# Altium PCB JtagProgCable.PcbDoc (part 1 of 2)
Units mil, origin at the board's own origin, x right, y up, seen from the top; angles counter-clockwise.
Board outline 2330 x 3440 mil, 4 copper layers (Top Layer, MidLayer1, VCC, Bottom Layer); 204 components, 19 nets, 965 pads, 156 vias.
Unrouted connection lines stored in the file: 209.
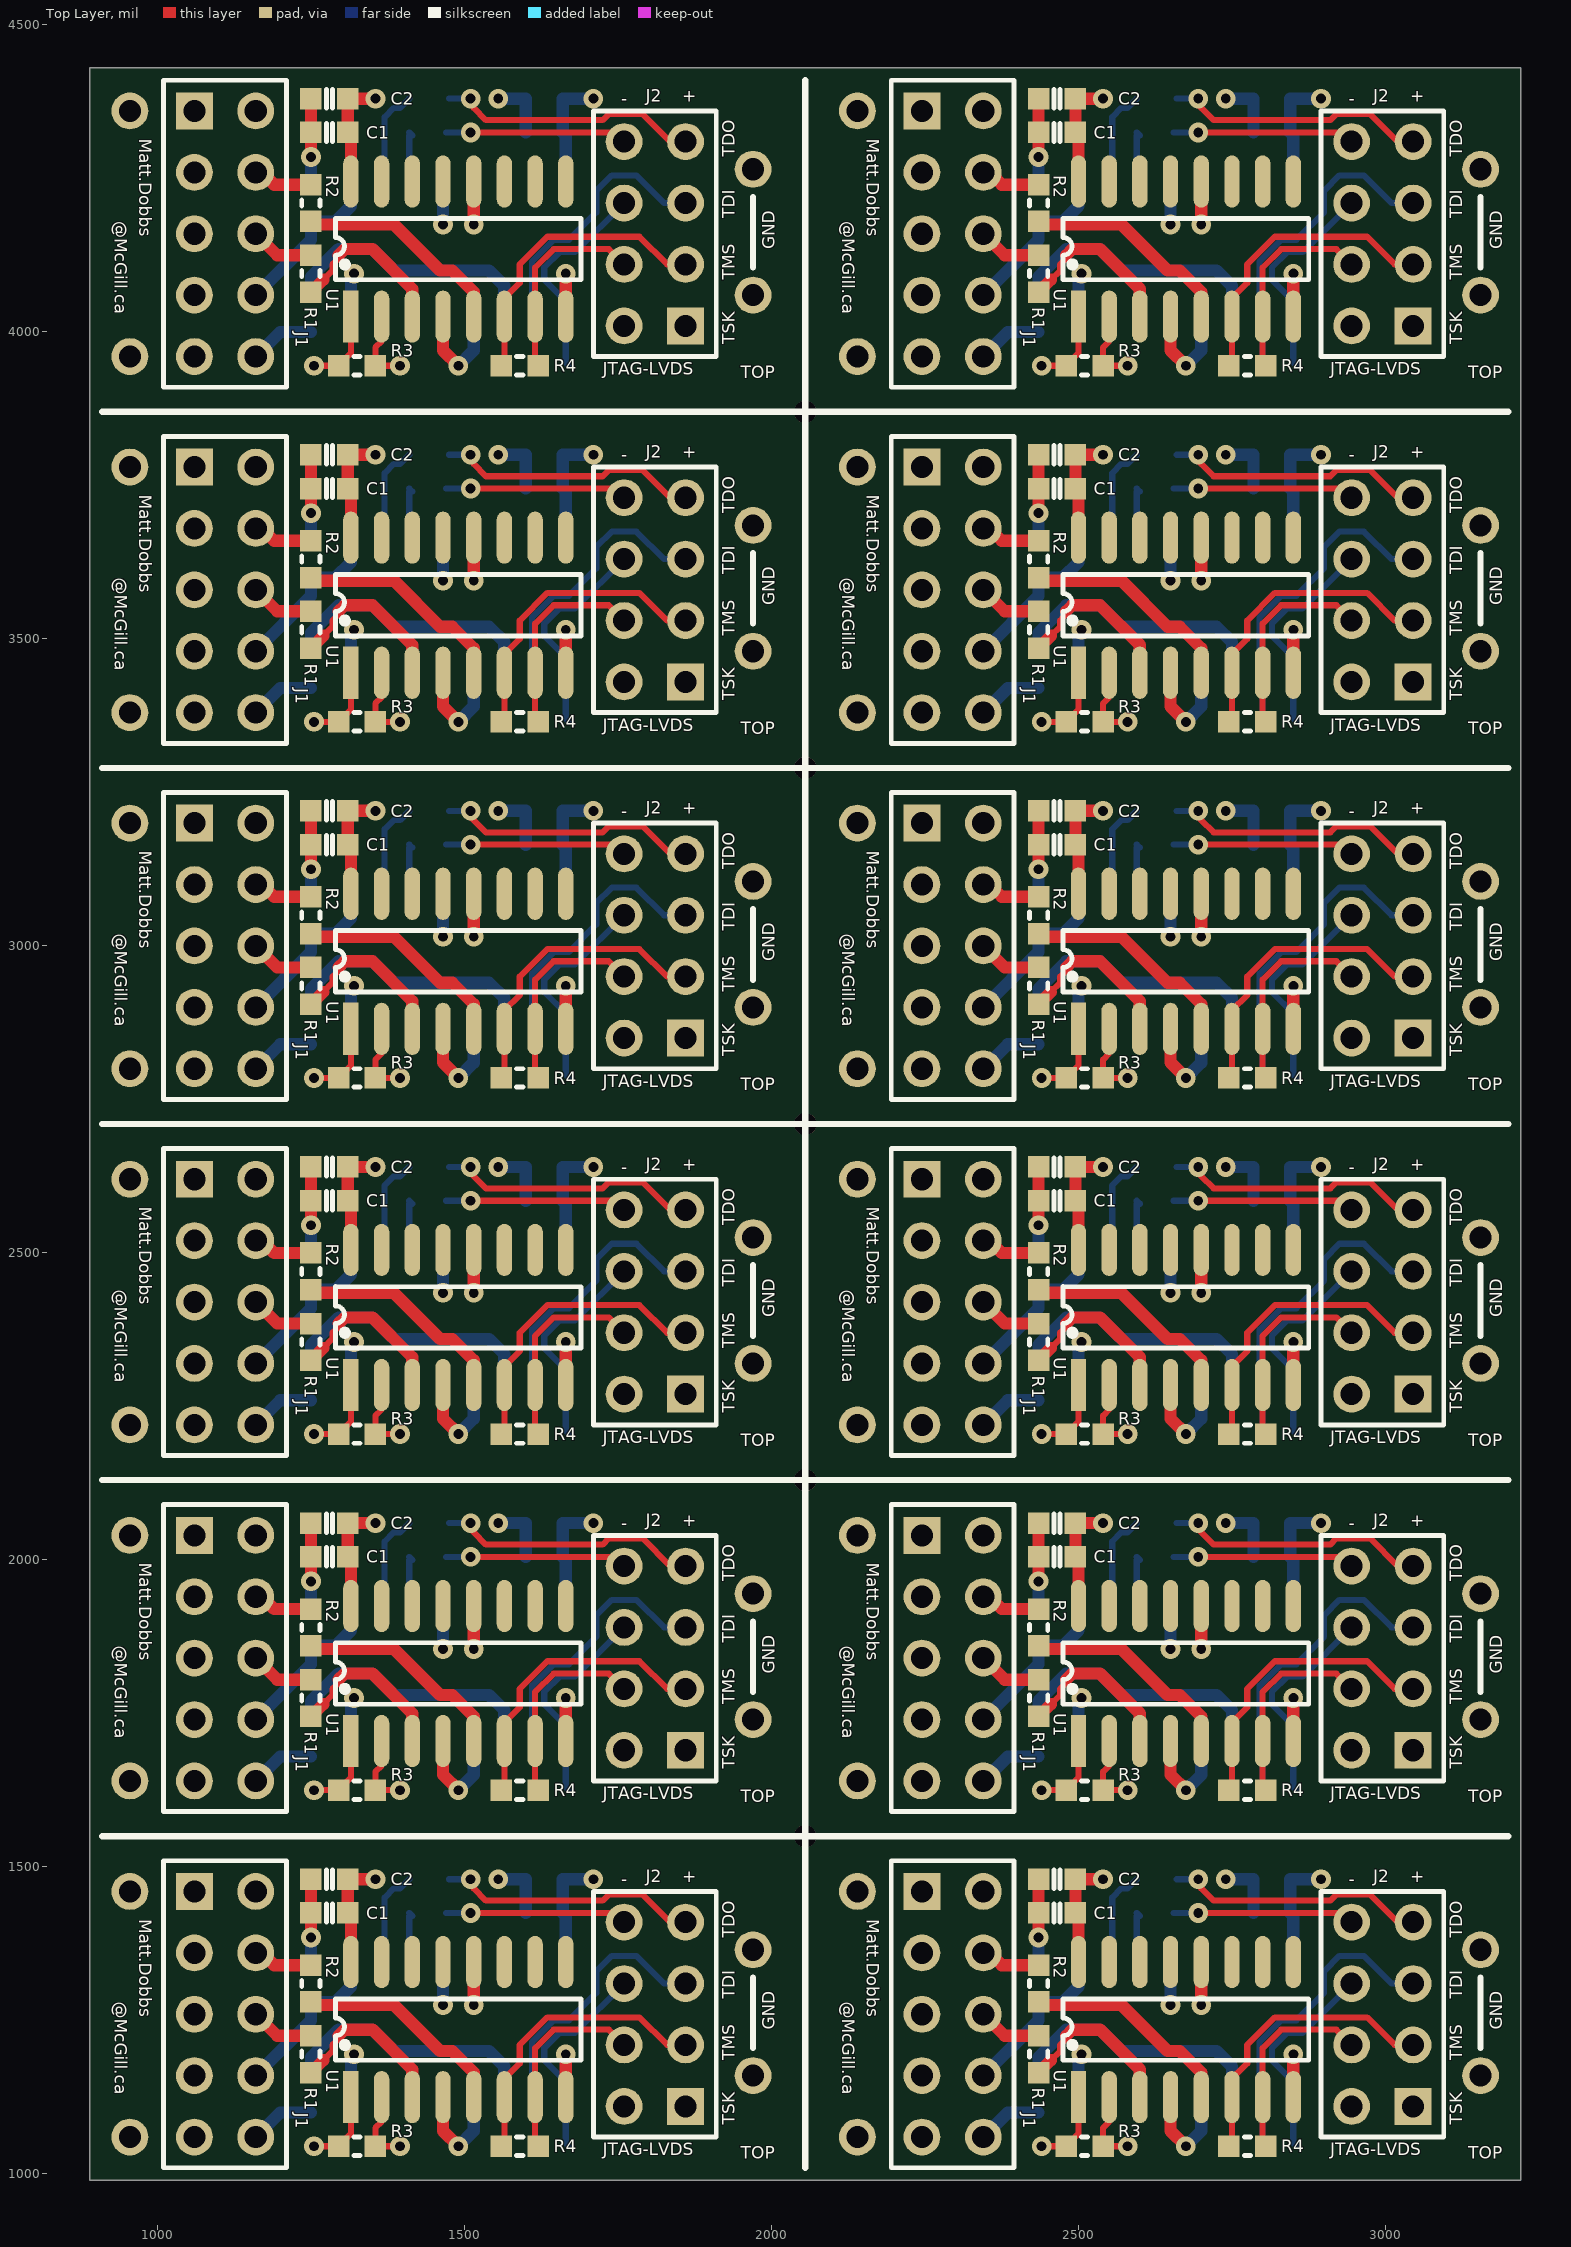
[diagram p0: Top Layer view]
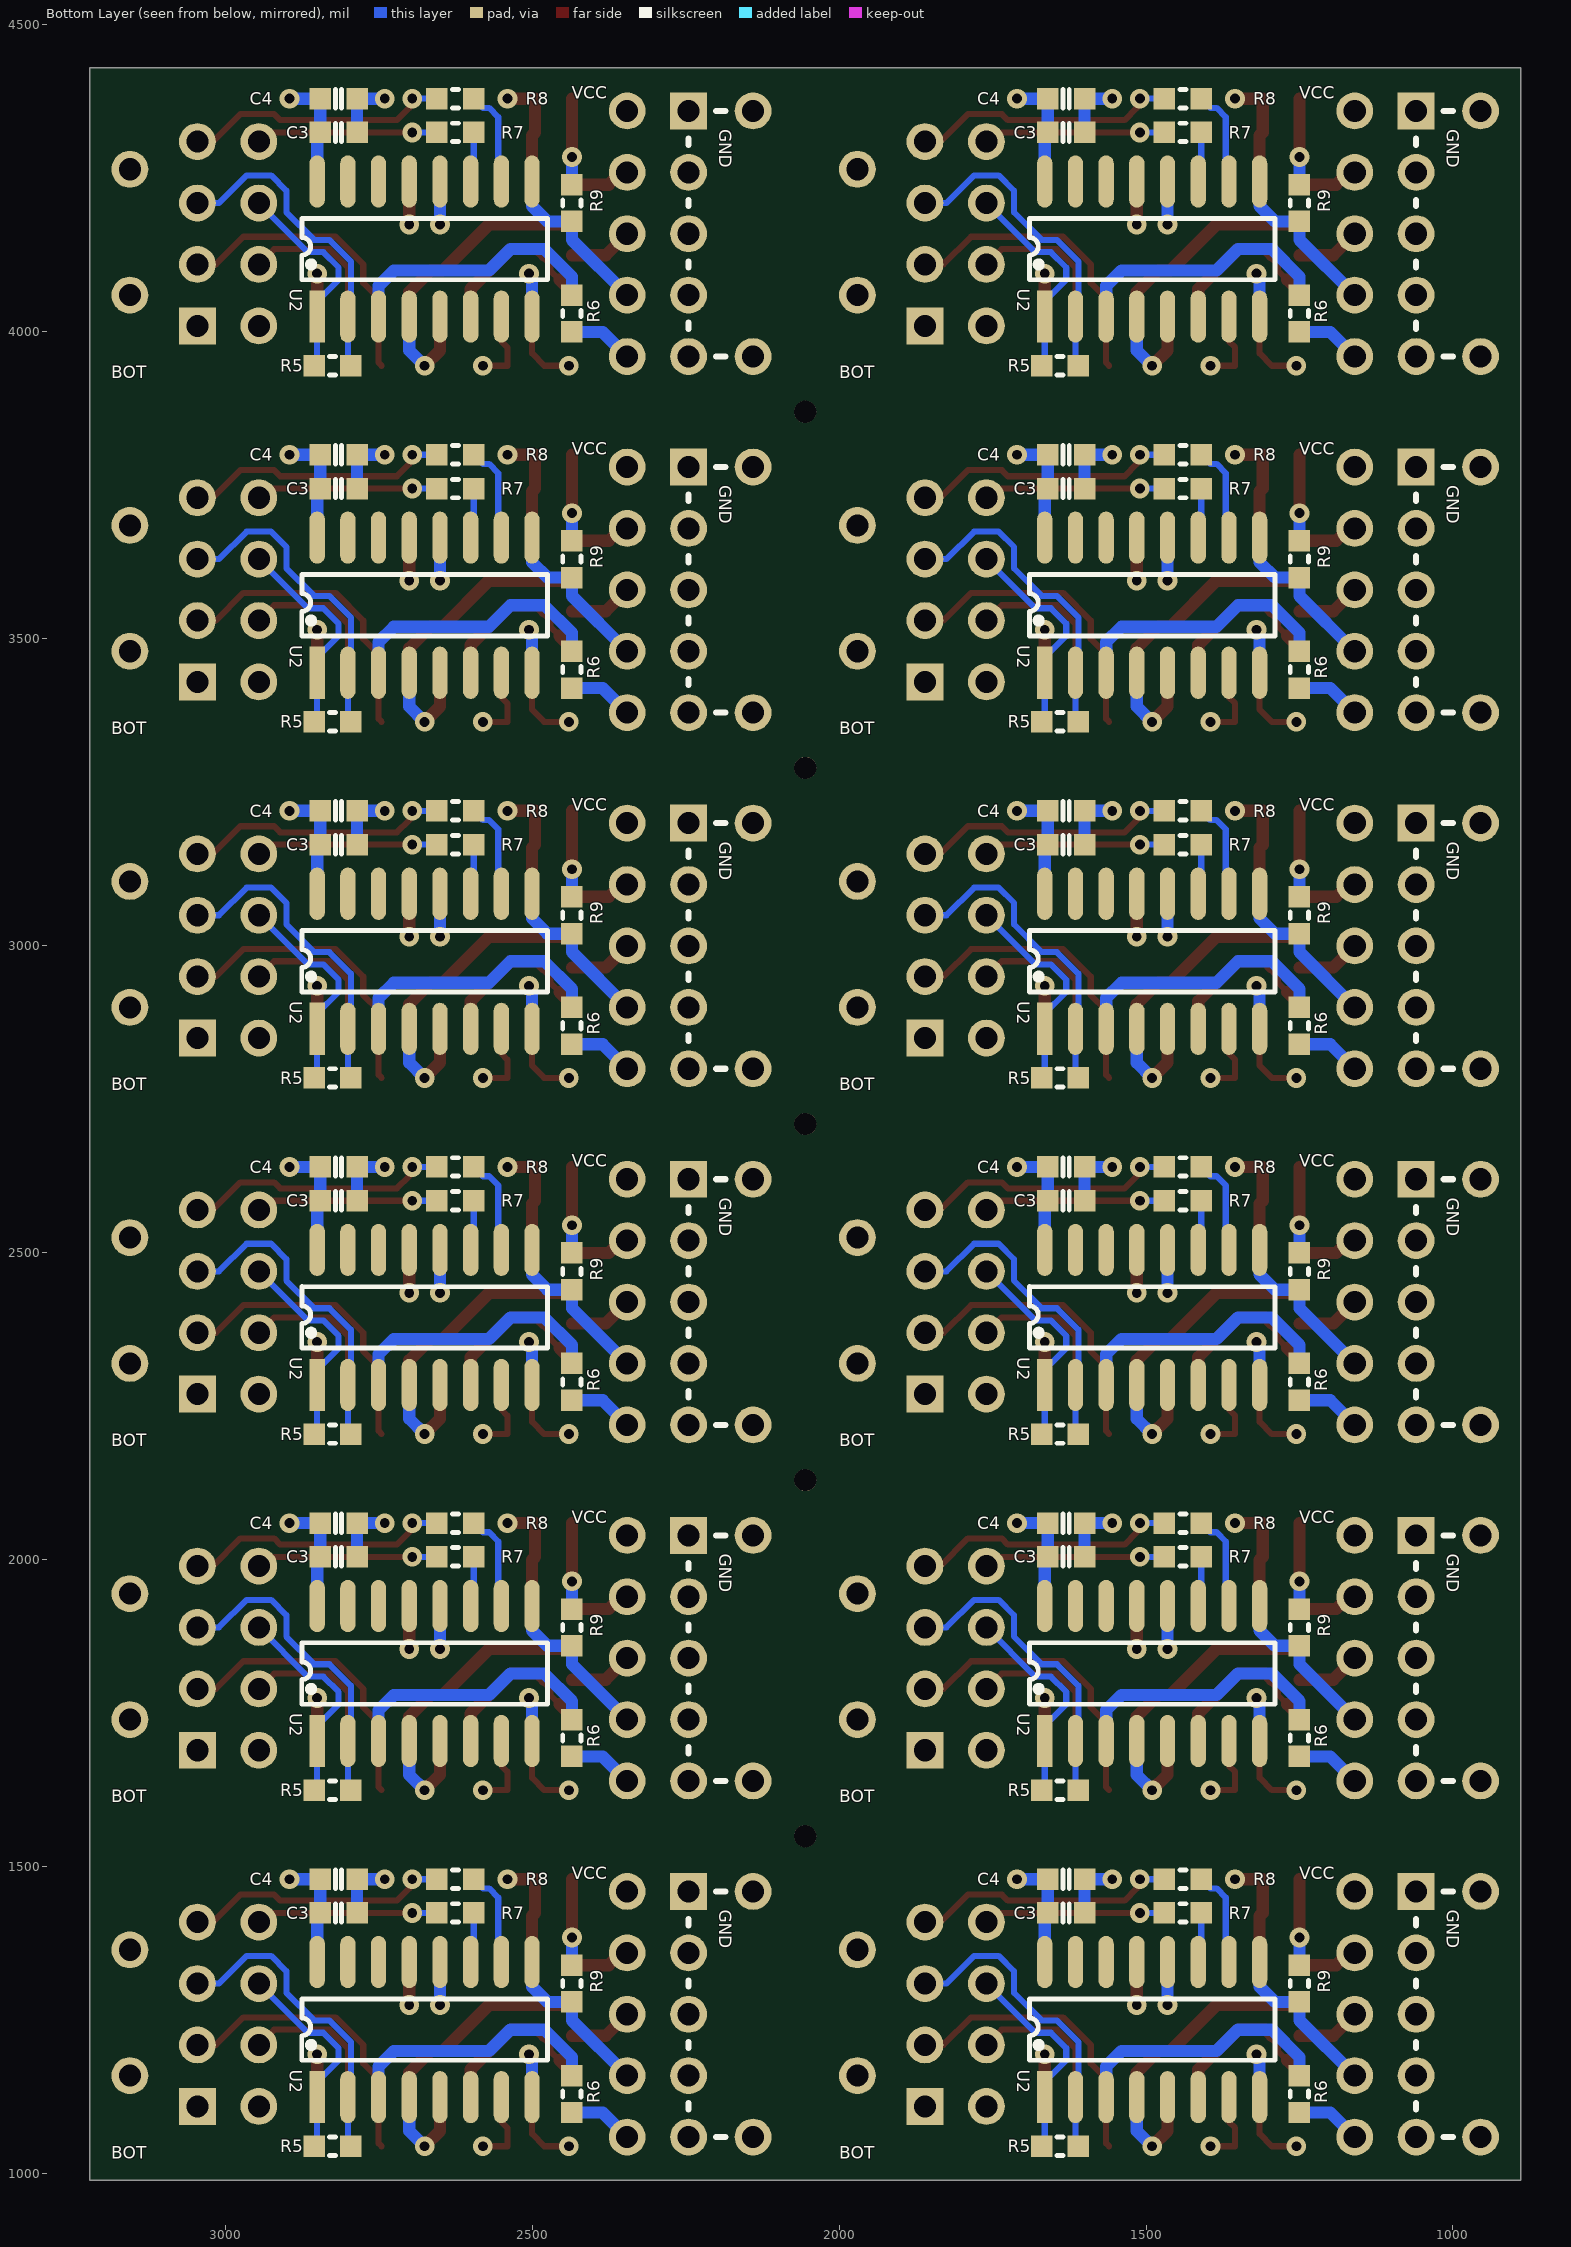
[diagram p1: Bottom Layer view, seen from below]
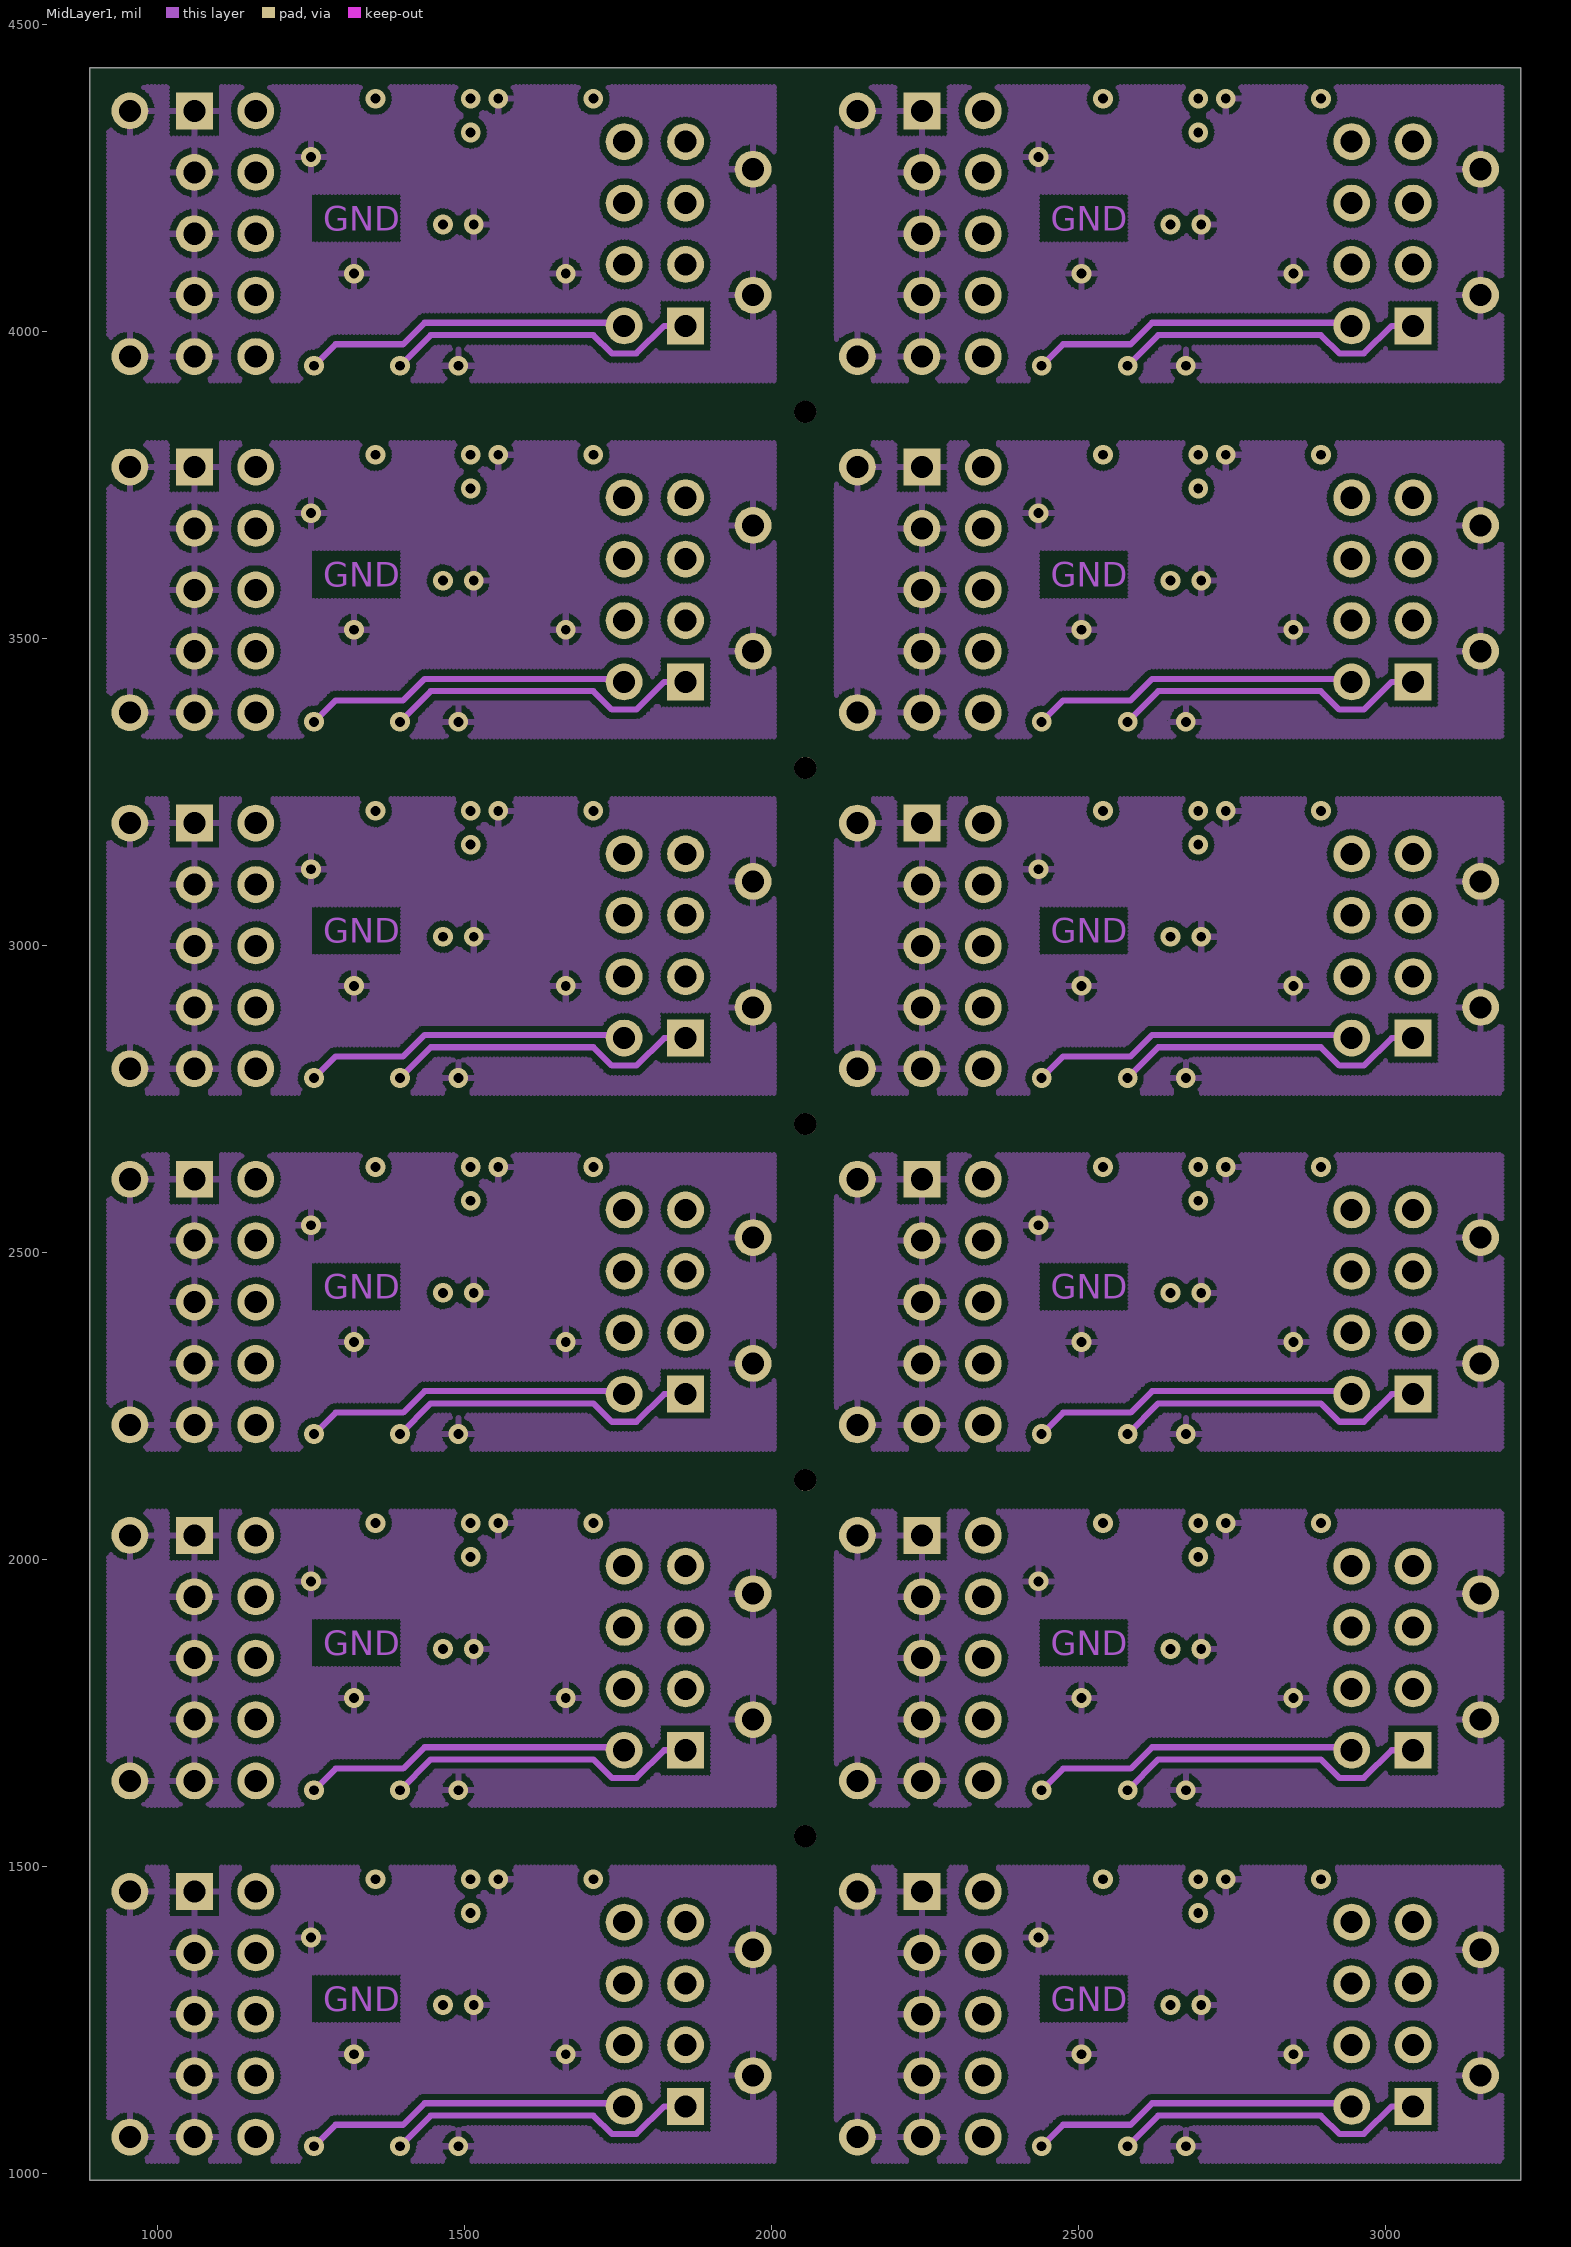
[diagram p2: MidLayer1]
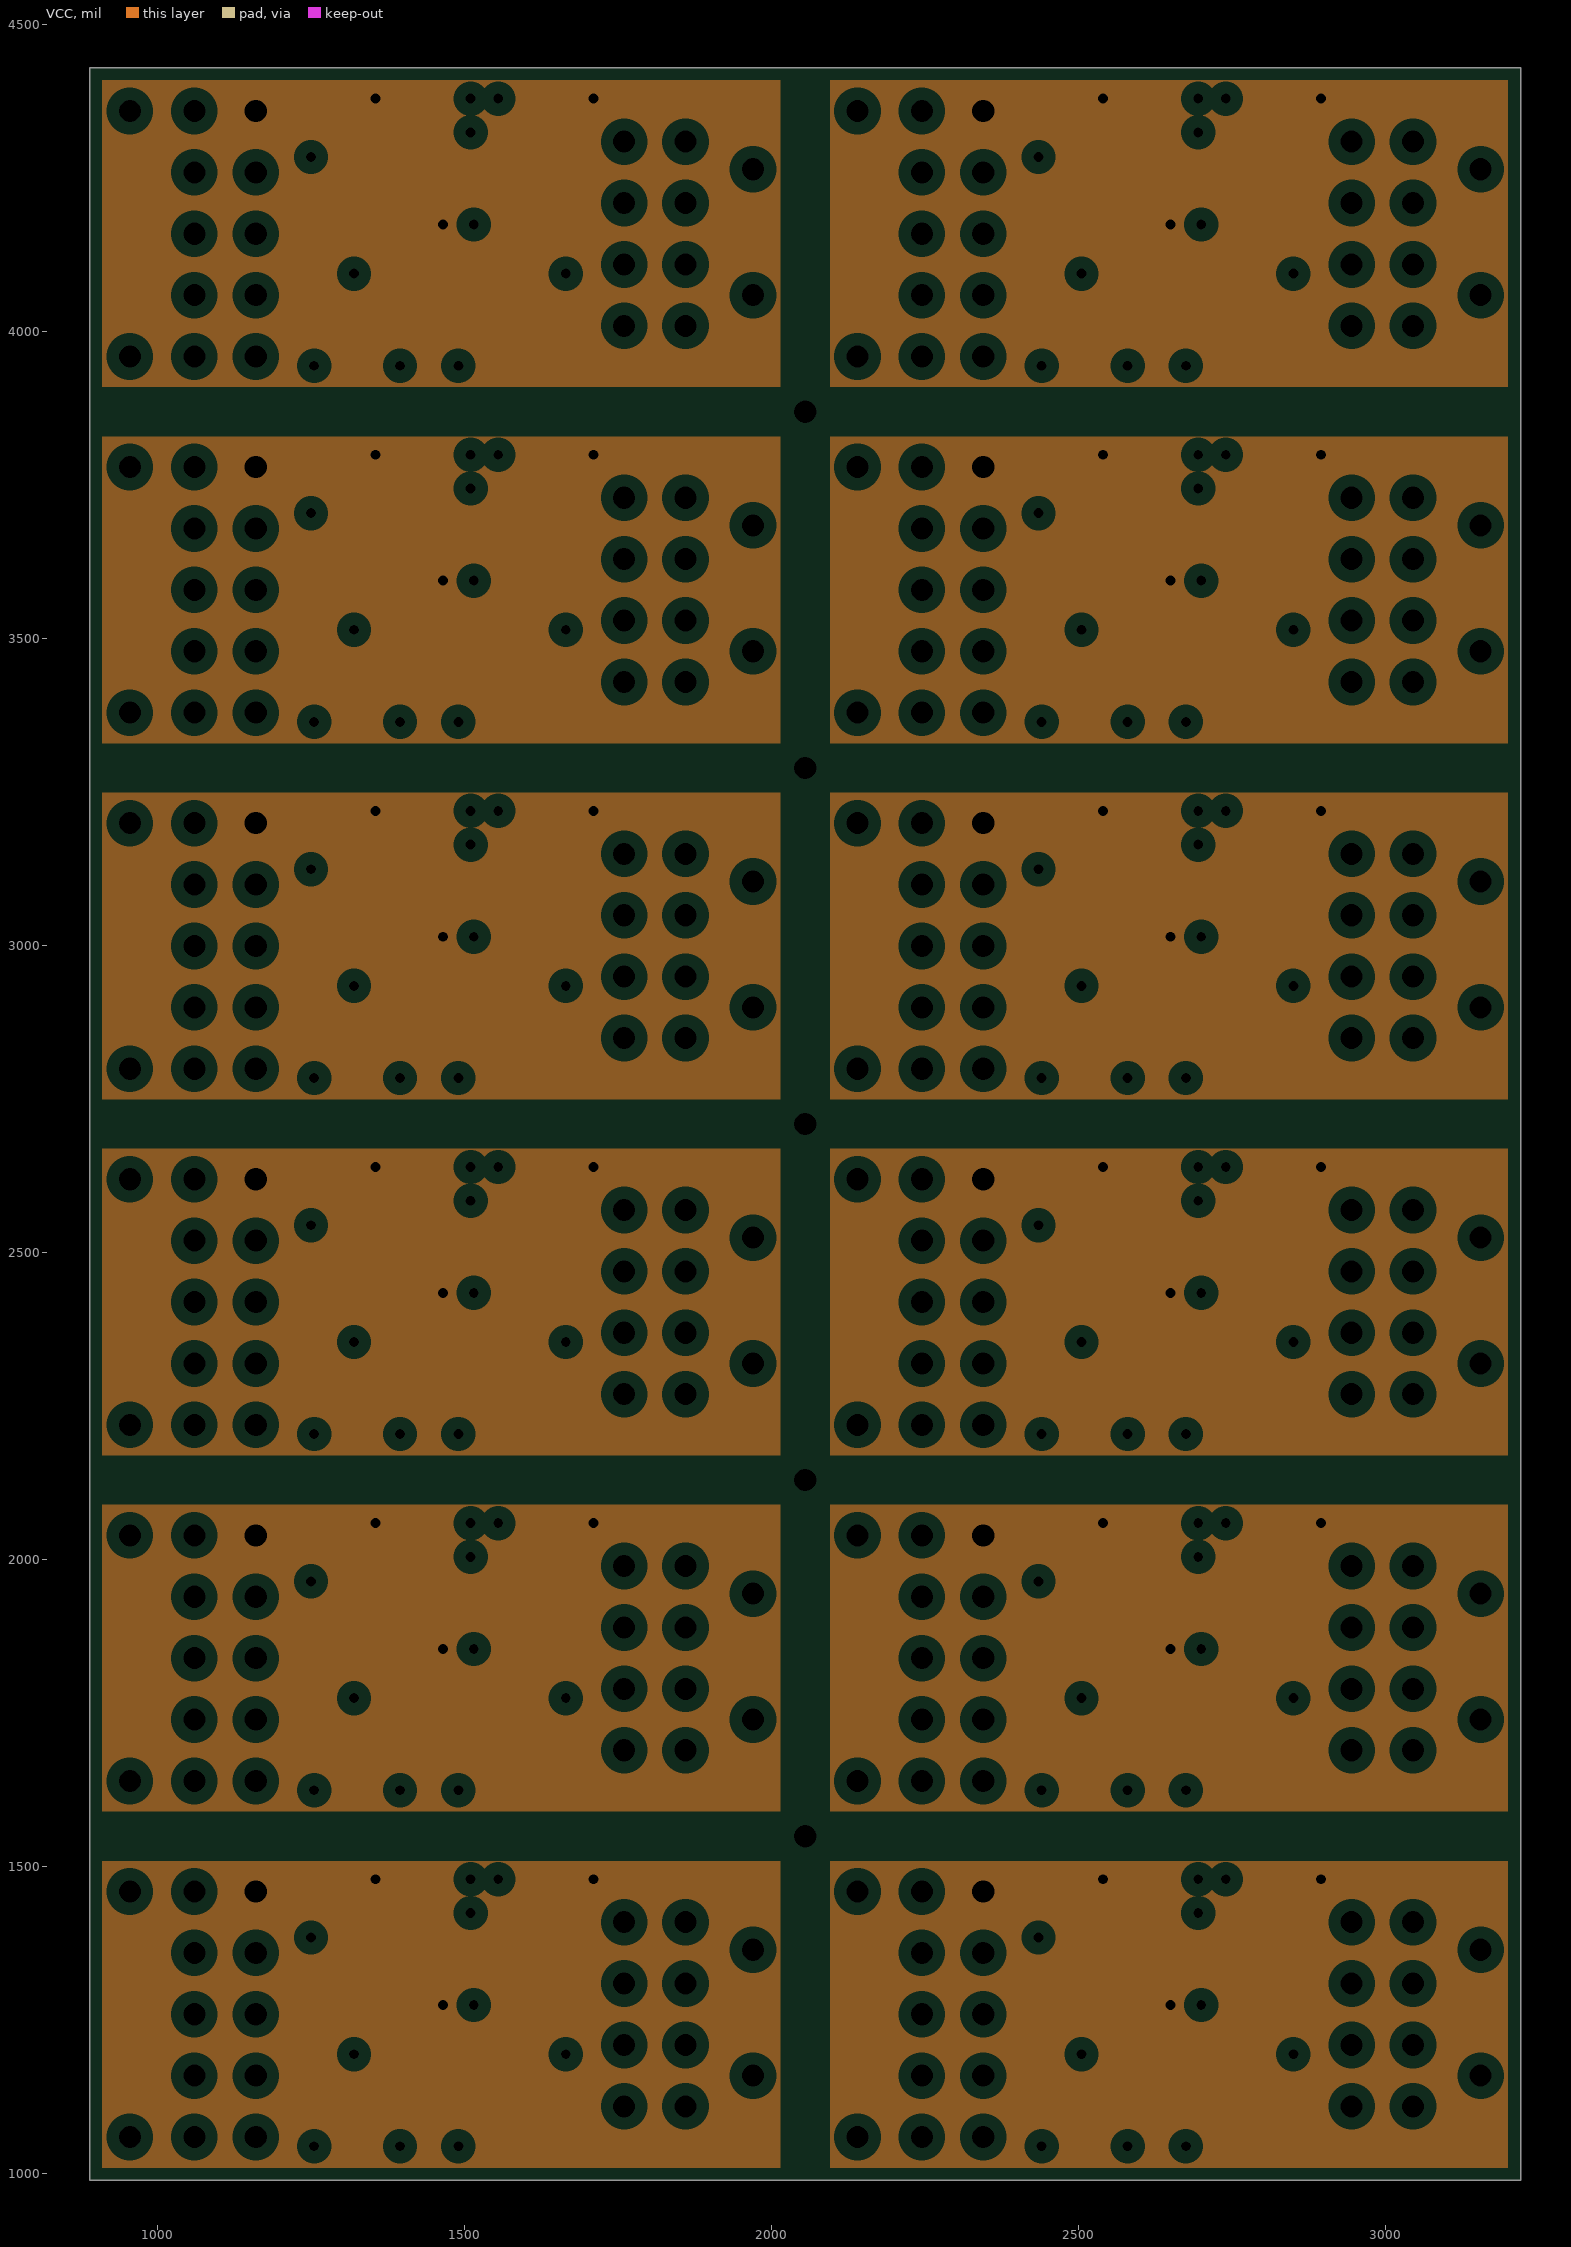
[diagram p3: VCC, clearances drawn from the general rule]

## Layer stack, top to bottom
Top Layer: signal copper 1.4
Dielectric: core 12.6, FR-4, Dk 4.8
MidLayer1: signal copper 1.4
Dielectric: prepreg 12.6, FR-4, Dk 4.8
VCC: plane copper 1.4, net VCC
Dielectric: core 12.6, FR-4, Dk 4.8
Bottom Layer: signal copper 1.4

## Board outline
890,990 3220,990 3220,4430 890,4430 890,990

## Design rules (kind name [scope] priority, off if disabled: settings)
Clearance [All] p1: gap=10
PlaneClearance [All] p1: clearance=20
PlaneConnect [All] p1: planeconnectstyle=Relief reliefexpansion=20 reliefentries=4 reliefconductorwidth=10 reliefairgap=10
PolygonConnect [All] p1: connectstyle=Relief reliefconductorwidth=10 reliefentries=4 polygonreliefangle="90 Angle"
RoomDefinition JtagProgCable_11 [InComponentClass('JtagProgCable')] p1: confinementstyle=ConfineIn formatcopy=TRUE lockcomponents=FALSE outline 1000,3900 1925,3900 1925,4420 1000,4420
RoomDefinition JtagProgCable_10 [InComponentClass('JtagProgCable')] p2: confinementstyle=ConfineIn formatcopy=TRUE lockcomponents=FALSE outline 1000,3320 1925,3320 1925,3840 1000,3840
RoomDefinition JtagProgCable_9 [InComponentClass('JtagProgCable')] p3: confinementstyle=ConfineIn formatcopy=TRUE lockcomponents=FALSE outline 1000,2740 1925,2740 1925,3260 1000,3260
RoomDefinition JtagProgCable_8 [InComponentClass('JtagProgCable')] p4: confinementstyle=ConfineIn formatcopy=TRUE lockcomponents=FALSE outline 1000,2160 1925,2160 1925,2680 1000,2680
RoomDefinition JtagProgCable_7 [InComponentClass('JtagProgCable')] p5: confinementstyle=ConfineIn formatcopy=TRUE lockcomponents=FALSE outline 1000,1580 1925,1580 1925,2100 1000,2100
RoomDefinition JtagProgCable_6 [InComponentClass('JtagProgCable')] p6: confinementstyle=ConfineIn formatcopy=TRUE lockcomponents=FALSE outline 2185,3900 3110,3900 3110,4420 2185,4420
RoomDefinition JtagProgCable_5 [InComponentClass('JtagProgCable')] p7: confinementstyle=ConfineIn formatcopy=TRUE lockcomponents=FALSE outline 2185,3320 3110,3320 3110,3840 2185,3840
RoomDefinition JtagProgCable_4 [InComponentClass('JtagProgCable')] p8: confinementstyle=ConfineIn formatcopy=TRUE lockcomponents=FALSE outline 2185,2740 3110,2740 3110,3260 2185,3260
RoomDefinition JtagProgCable_3 [InComponentClass('JtagProgCable')] p9: confinementstyle=ConfineIn formatcopy=TRUE lockcomponents=FALSE outline 2185,2160 3110,2160 3110,2680 2185,2680
RoomDefinition JtagProgCable_2 [InComponentClass('JtagProgCable')] p10: confinementstyle=ConfineIn formatcopy=TRUE lockcomponents=FALSE outline 2185,1580 3110,1580 3110,2100 2185,2100
RoomDefinition JtagProgCable_1 [InComponentClass('JtagProgCable')] p11: confinementstyle=ConfineIn formatcopy=TRUE lockcomponents=FALSE outline 2185,1000 3110,1000 3110,1520 2185,1520
RoomDefinition JtagProgCable [InComponentClass('JtagProgCable')] p12: confinementstyle=ConfineIn formatcopy=TRUE lockcomponents=FALSE outline 1000,1000 1925,1000 1925,1520 1000,1520
RoutingVias [All] p1: holewidth=32 width=16 viastyle="Through Hole" minholewidth=16 minwidth=8 maxholewidth=28 maxwidth=50
SolderMaskExpansion [All] p1: expansion=4
TestPointUsage [All] p1: valid=0 allowmultiple=FALSE
Testpoint [All] p1: side=15 testpointundercomponent=TRUE minsize=40 maxsize=100 preferedsize=60 minholesize=0 maxholesize=40 preferedholesize=32 testpointgrid=1 style=1023 order=0-112345678
Width [All] p1: maxlimit=50 minlimit=10 preferedwidth=10
17 further rules are at their usual default settings.

## Classes and differential pairs
component class JtagProgCable: C1 C2 C3 C4 J1 J2 R1 R2 R3 R4 R5 R6 R7 R8 R9 U1 U2

## Components (designator, comment, footprint, x,y, rotation, side; value= is the part's Value field where it differs from the comment)
C1 "0.1uF" CC1608-0603M 1250,1425 r0 top
C1 "0.1uF" CC1608-0603M 2435,1425 r0 top
C1 "0.1uF" CC1608-0603M 2435,2005 r0 top
C1 "0.1uF" CC1608-0603M 2435,2585 r0 top
C1 "0.1uF" CC1608-0603M 2435,3165 r0 top
C1 "0.1uF" CC1608-0603M 2435,3745 r0 top
C1 "0.1uF" CC1608-0603M 2435,4325 r0 top
C1 "0.1uF" CC1608-0603M 1250,2005 r0 top
C1 "0.1uF" CC1608-0603M 1250,2585 r0 top
C1 "0.1uF" CC1608-0603M 1250,3165 r0 top
C1 "0.1uF" CC1608-0603M 1250,3745 r0 top
C1 "0.1uF" CC1608-0603M 1250,4325 r0 top
C2 "0.01uF" CC1608-0603M 1250,1480 r0 top
C2 "0.01uF" CC1608-0603M 2435,1480 r0 top
C2 "0.01uF" CC1608-0603M 2435,2060 r0 top
C2 "0.01uF" CC1608-0603M 2435,2640 r0 top
C2 "0.01uF" CC1608-0603M 2435,3220 r0 top
C2 "0.01uF" CC1608-0603M 2435,3800 r0 top
C2 "0.01uF" CC1608-0603M 2435,4380 r0 top
C2 "0.01uF" CC1608-0603M 1250,2060 r0 top
C2 "0.01uF" CC1608-0603M 1250,2640 r0 top
C2 "0.01uF" CC1608-0603M 1250,3220 r0 top
C2 "0.01uF" CC1608-0603M 1250,3800 r0 top
C2 "0.01uF" CC1608-0603M 1250,4380 r0 top
C3 "0.1uF" CC1608-0603M 1600,1425 r0 bottom
C3 "0.1uF" CC1608-0603M 2785,1425 r0 bottom
C3 "0.1uF" CC1608-0603M 2785,2005 r0 bottom
C3 "0.1uF" CC1608-0603M 2785,2585 r0 bottom
C3 "0.1uF" CC1608-0603M 2785,3165 r0 bottom
C3 "0.1uF" CC1608-0603M 2785,3745 r0 bottom
C3 "0.1uF" CC1608-0603M 2785,4325 r0 bottom
C3 "0.1uF" CC1608-0603M 1600,2005 r0 bottom
C3 "0.1uF" CC1608-0603M 1600,2585 r0 bottom
C3 "0.1uF" CC1608-0603M 1600,3165 r0 bottom
C3 "0.1uF" CC1608-0603M 1600,3745 r0 bottom
C3 "0.1uF" CC1608-0603M 1600,4325 r0 bottom
C4 "0.01uF" CC1608-0603M 1600,1480 r0 bottom
C4 "0.01uF" CC1608-0603M 2785,1480 r0 bottom
C4 "0.01uF" CC1608-0603M 2785,2060 r0 bottom
C4 "0.01uF" CC1608-0603M 2785,2640 r0 bottom
C4 "0.01uF" CC1608-0603M 2785,3220 r0 bottom
C4 "0.01uF" CC1608-0603M 2785,3800 r0 bottom
C4 "0.01uF" CC1608-0603M 2785,4380 r0 bottom
C4 "0.01uF" CC1608-0603M 1600,2060 r0 bottom
C4 "0.01uF" CC1608-0603M 1600,2640 r0 bottom
C4 "0.01uF" CC1608-0603M 1600,3220 r0 bottom
C4 "0.01uF" CC1608-0603M 1600,3800 r0 bottom
C4 "0.01uF" CC1608-0603M 1600,4380 r0 bottom
J1 "Header 2x5" HDR2X5 1060,1460 r270 top
J1 "Header 2x5" HDR2X5 2245,1460 r270 top
J1 "Header 2x5" HDR2X5 2245,2040 r270 top
J1 "Header 2x5" HDR2X5 2245,2620 r270 top
J1 "Header 2x5" HDR2X5 2245,3200 r270 top
J1 "Header 2x5" HDR2X5 2245,3780 r270 top
J1 "Header 2x5" HDR2X5 2245,4360 r270 top
J1 "Header 2x5" HDR2X5 1060,2040 r270 top
J1 "Header 2x5" HDR2X5 1060,2620 r270 top
J1 "Header 2x5" HDR2X5 1060,3200 r270 top
J1 "Header 2x5" HDR2X5 1060,3780 r270 top
J1 "Header 2x5" HDR2X5 1060,4360 r270 top
J2 "Header 2x4" HDR2X4 1860,1110 r90 top
J2 "Header 2x4" HDR2X4 3045,1110 r90 top
J2 "Header 2x4" HDR2X4 3045,1690 r90 top
J2 "Header 2x4" HDR2X4 3045,2270 r90 top
J2 "Header 2x4" HDR2X4 3045,2850 r90 top
J2 "Header 2x4" HDR2X4 3045,3430 r90 top
J2 "Header 2x4" HDR2X4 3045,4010 r90 top
J2 "Header 2x4" HDR2X4 1860,1690 r90 top
J2 "Header 2x4" HDR2X4 1860,2270 r90 top
J2 "Header 2x4" HDR2X4 1860,2850 r90 top
J2 "Header 2x4" HDR2X4 1860,3430 r90 top
J2 "Header 2x4" HDR2X4 1860,4010 r90 top
R1 "Rd" CR1608-0603M 1250,1165 r90 top
R1 "Rd" CR1608-0603M 2435,1165 r90 top
R1 "Rd" CR1608-0603M 2435,1745 r90 top
R1 "Rd" CR1608-0603M 2435,2325 r90 top
R1 "Rd" CR1608-0603M 2435,2905 r90 top
R1 "Rd" CR1608-0603M 2435,3485 r90 top
R1 "Rd" CR1608-0603M 2435,4065 r90 top
R1 "Rd" CR1608-0603M 1250,1745 r90 top
R1 "Rd" CR1608-0603M 1250,2325 r90 top
R1 "Rd" CR1608-0603M 1250,2905 r90 top
R1 "Rd" CR1608-0603M 1250,3485 r90 top
R1 "Rd" CR1608-0603M 1250,4065 r90 top
R2 "Rd" CR1608-0603M 1250,1280 r90 top
R2 "Rd" CR1608-0603M 2435,1280 r90 top
R2 "Rd" CR1608-0603M 2435,1860 r90 top
R2 "Rd" CR1608-0603M 2435,2440 r90 top
R2 "Rd" CR1608-0603M 2435,3020 r90 top
R2 "Rd" CR1608-0603M 2435,3600 r90 top
R2 "Rd" CR1608-0603M 2435,4180 r90 top
R2 "Rd" CR1608-0603M 1250,1860 r90 top
R2 "Rd" CR1608-0603M 1250,2440 r90 top
R2 "Rd" CR1608-0603M 1250,3020 r90 top
R2 "Rd" CR1608-0603M 1250,3600 r90 top
R2 "Rd" CR1608-0603M 1250,4180 r90 top
R3 "100" CR1608-0603M 1295,1045 r0 top
R3 "100" CR1608-0603M 2480,1045 r0 top
R3 "100" CR1608-0603M 2480,1625 r0 top
R3 "100" CR1608-0603M 2480,2205 r0 top
R3 "100" CR1608-0603M 2480,2785 r0 top
R3 "100" CR1608-0603M 2480,3365 r0 top
R3 "100" CR1608-0603M 2480,3945 r0 top
R3 "100" CR1608-0603M 1295,1625 r0 top
R3 "100" CR1608-0603M 1295,2205 r0 top
R3 "100" CR1608-0603M 1295,2785 r0 top
R3 "100" CR1608-0603M 1295,3365 r0 top
R3 "100" CR1608-0603M 1295,3945 r0 top
R4 "100" CR1608-0603M 1560,1045 r0 top
R4 "100" CR1608-0603M 2745,1045 r0 top
R4 "100" CR1608-0603M 2745,1625 r0 top
R4 "100" CR1608-0603M 2745,2205 r0 top
R4 "100" CR1608-0603M 2745,2785 r0 top
R4 "100" CR1608-0603M 2745,3365 r0 top
R4 "100" CR1608-0603M 2745,3945 r0 top
R4 "100" CR1608-0603M 1560,1625 r0 top
R4 "100" CR1608-0603M 1560,2205 r0 top
R4 "100" CR1608-0603M 1560,2785 r0 top
R4 "100" CR1608-0603M 1560,3365 r0 top
R4 "100" CR1608-0603M 1560,3945 r0 top
R5 "100" CR1608-0603M 1610,1045 r0 bottom
R5 "100" CR1608-0603M 2795,1045 r0 bottom
R5 "100" CR1608-0603M 2795,1625 r0 bottom
R5 "100" CR1608-0603M 2795,2205 r0 bottom
R5 "100" CR1608-0603M 2795,2785 r0 bottom
R5 "100" CR1608-0603M 2795,3365 r0 bottom
R5 "100" CR1608-0603M 2795,3945 r0 bottom
R5 "100" CR1608-0603M 1610,1625 r0 bottom
R5 "100" CR1608-0603M 1610,2205 r0 bottom
R5 "100" CR1608-0603M 1610,2785 r0 bottom
R5 "100" CR1608-0603M 1610,3365 r0 bottom
R5 "100" CR1608-0603M 1610,3945 r0 bottom
R6 "Rd" CR1608-0603M 1250,1160 r270 bottom
R6 "Rd" CR1608-0603M 2435,1160 r270 bottom
R6 "Rd" CR1608-0603M 2435,1740 r270 bottom
R6 "Rd" CR1608-0603M 2435,2320 r270 bottom
R6 "Rd" CR1608-0603M 2435,2900 r270 bottom
R6 "Rd" CR1608-0603M 2435,3480 r270 bottom
R6 "Rd" CR1608-0603M 2435,4060 r270 bottom
R6 "Rd" CR1608-0603M 1250,1740 r270 bottom
R6 "Rd" CR1608-0603M 1250,2320 r270 bottom
R6 "Rd" CR1608-0603M 1250,2900 r270 bottom
R6 "Rd" CR1608-0603M 1250,3480 r270 bottom
R6 "Rd" CR1608-0603M 1250,4060 r270 bottom
R7 "50" CR1608-0603M 1410,1425 r0 bottom
R7 "50" CR1608-0603M 2595,1425 r0 bottom
R7 "50" CR1608-0603M 2595,2005 r0 bottom
R7 "50" CR1608-0603M 2595,2585 r0 bottom
R7 "50" CR1608-0603M 2595,3165 r0 bottom
R7 "50" CR1608-0603M 2595,3745 r0 bottom
R7 "50" CR1608-0603M 2595,4325 r0 bottom
R7 "50" CR1608-0603M 1410,2005 r0 bottom
R7 "50" CR1608-0603M 1410,2585 r0 bottom
R7 "50" CR1608-0603M 1410,3165 r0 bottom
R7 "50" CR1608-0603M 1410,3745 r0 bottom
R7 "50" CR1608-0603M 1410,4325 r0 bottom
R8 "50" CR1608-0603M 1410,1480 r0 bottom
R8 "50" CR1608-0603M 2595,1480 r0 bottom
R8 "50" CR1608-0603M 2595,2060 r0 bottom
R8 "50" CR1608-0603M 2595,2640 r0 bottom
R8 "50" CR1608-0603M 2595,3220 r0 bottom
R8 "50" CR1608-0603M 2595,3800 r0 bottom
R8 "50" CR1608-0603M 2595,4380 r0 bottom
R8 "50" CR1608-0603M 1410,2060 r0 bottom
R8 "50" CR1608-0603M 1410,2640 r0 bottom
R8 "50" CR1608-0603M 1410,3220 r0 bottom
R8 "50" CR1608-0603M 1410,3800 r0 bottom
R8 "50" CR1608-0603M 1410,4380 r0 bottom
R9 "Rd" CR1608-0603M 1250,1280 r90 bottom
R9 "Rd" CR1608-0603M 2435,1280 r90 bottom
R9 "Rd" CR1608-0603M 2435,1860 r90 bottom
R9 "Rd" CR1608-0603M 2435,2440 r90 bottom
R9 "Rd" CR1608-0603M 2435,3020 r90 bottom
R9 "Rd" CR1608-0603M 2435,3600 r90 bottom
R9 "Rd" CR1608-0603M 2435,4180 r90 bottom
R9 "Rd" CR1608-0603M 1250,1860 r90 bottom
R9 "Rd" CR1608-0603M 1250,2440 r90 bottom
R9 "Rd" CR1608-0603M 1250,3020 r90 bottom
R9 "Rd" CR1608-0603M 1250,3600 r90 bottom
R9 "Rd" CR1608-0603M 1250,4180 r90 bottom
U1 "SN65LVDM051QDQ1" "SO-G16 (SOIC)" 1315,1125 r0 top
U1 "SN65LVDM051QDQ1" "SO-G16 (SOIC)" 2500,1125 r0 top
U1 "SN65LVDM051QDQ1" "SO-G16 (SOIC)" 2500,1705 r0 top
U1 "SN65LVDM051QDQ1" "SO-G16 (SOIC)" 2500,2285 r0 top
U1 "SN65LVDM051QDQ1" "SO-G16 (SOIC)" 2500,2865 r0 top
U1 "SN65LVDM051QDQ1" "SO-G16 (SOIC)" 2500,3445 r0 top
U1 "SN65LVDM051QDQ1" "SO-G16 (SOIC)" 2500,4025 r0 top
U1 "SN65LVDM051QDQ1" "SO-G16 (SOIC)" 1315,1705 r0 top
U1 "SN65LVDM051QDQ1" "SO-G16 (SOIC)" 1315,2285 r0 top
U1 "SN65LVDM051QDQ1" "SO-G16 (SOIC)" 1315,2865 r0 top
U1 "SN65LVDM051QDQ1" "SO-G16 (SOIC)" 1315,3445 r0 top
U1 "SN65LVDM051QDQ1" "SO-G16 (SOIC)" 1315,4025 r0 top
U2 "SN65LVDM051QDQ1" "SO-G16 (SOIC)" 1664.94,1125 r180 bottom
U2 "SN65LVDM051QDQ1" "SO-G16 (SOIC)" 2849.94,1125 r180 bottom
U2 "SN65LVDM051QDQ1" "SO-G16 (SOIC)" 2849.94,1705 r180 bottom
U2 "SN65LVDM051QDQ1" "SO-G16 (SOIC)" 2849.94,2285 r180 bottom
U2 "SN65LVDM051QDQ1" "SO-G16 (SOIC)" 2849.94,2865 r180 bottom
U2 "SN65LVDM051QDQ1" "SO-G16 (SOIC)" 2849.94,3445 r180 bottom
U2 "SN65LVDM051QDQ1" "SO-G16 (SOIC)" 2849.94,4025 r180 bottom
U2 "SN65LVDM051QDQ1" "SO-G16 (SOIC)" 1664.94,1705 r180 bottom
U2 "SN65LVDM051QDQ1" "SO-G16 (SOIC)" 1664.94,2285 r180 bottom
U2 "SN65LVDM051QDQ1" "SO-G16 (SOIC)" 1664.94,2865 r180 bottom
U2 "SN65LVDM051QDQ1" "SO-G16 (SOIC)" 1664.94,3445 r180 bottom
U2 "SN65LVDM051QDQ1" "SO-G16 (SOIC)" 1664.94,4025 r180 bottom

## Footprints (in the part's own frame and the unit in brackets; to place one, negate y for a bottom-side part, rotate by r counter-clockwise, add the part's x,y. Pads: shape width x height; smd on the part's side, far side on the other; paste and mask are expansions set on the pad)
CC1608-0603M [mil] "Chip Capacitor; Body 1.6 x 0.8 mm (LxW typ)"
  rect 35x35 smd: 1(0,0) 2(60,0)
  silkscreen extent 25,-15 35,15
CR1608-0603M [mil] "Chip Resistor; Body 1.6 x 0.8 mm (LxW typ)"
  rect 35x35 smd: 1(0,0) 2(60,0)
  silkscreen extent 25,-15 35,15
HDR2X4 [mil] "Connector; Header; 2x4 Position"
  rect 60x60 hole 36: 1(0,0)
  round 60 hole 36: 2(0,100) 3(100,0) 4(100,100) 5(200,0) 6(200,100) 7(300,0) 8(300,100)
  silkscreen extent -50,-50 350,150
HDR2X5 [mil] "Connector; Header; 2x5 Position"
  rect 60x60 hole 36: 1(0,0)
  round 60 hole 36: 2(0,100) 3(100,0) 4(100,100) 5(200,0) 6(200,100) 7(300,0) 8(300,100) 9(400,0) 10(400,100)
  silkscreen extent -50,-50 450,150
"SO-G16 (SOIC)" [mil] "Small Outline; 16 Leads; Body Width 3.9 mm; Pitch 1.27 mm"
  rect 25x85 smd: 1(0,0)
  oval 25x85 smd: 2(50,0) 3(100,0) 4(150,0) 5(200,0) 6(250,0) 7(300,0) 8(350,0) 9(350,220) 10(300,220) 11(250,220) 12(200,220) 13(150,220) 14(100,220) 15(50,220) 16(0,220)
  silkscreen extent -25,60 375,160

## Part data
C1 C1 C1 C1 C1 C1 C1 C1 C1 C1 C1 C1 C2 C2 C2 C2 C2 C2 C2 C2 C2 C2 C2 C2 C3 C3 C3 C3 C3 C3 C3 C3 C3 C3 C3 C3 C4 C4 C4 C4 C4 C4 C4 C4 C4 C4 C4 C4: library part Cap1, "Capacitor, Ceramic, 0603"
J1 J1 J1 J1 J1 J1 J1 J1 J1 J1 J1 J1: "Header, 0.1\" 5x2-Pin straight"
J2 J2 J2 J2 J2 J2 J2 J2 J2 J2 J2 J2: "Header, 0.1\" 4x2-Pin straight"
R1 R1 R1 R1 R1 R1 R1 R1 R1 R1 R1 R1 R2 R2 R2 R2 R2 R2 R2 R2 R2 R2 R2 R2 R3 R3 R3 R3 R3 R3 R3 R3 R3 R3 R3 R3 R4 R4 R4 R4 R4 R4 R4 R4 R4 R4 R4 R4 R5 R5 R5 R5 R5 R5 R5 R5 R5 R5 R5 R5 R6 R6 R6 R6 R6 R6 R6 R6 R6 R6 R6 R6 R7 R7 R7 R7 R7 R7 R7 R7 R7 R7 R7 R7 R8 R8 R8 R8 R8 R8 R8 R8 R8 R8 R8 R8 R9 R9 R9 R9 R9 R9 R9 R9 R9 R9 R9 R9: library part Res1, "Resistor, 1%, 100ppm, 0603"
U1 U1 U1 U1 U1 U1 U1 U1 U1 U1 U1 U1 U2 U2 U2 U2 U2 U2 U2 U2 U2 U2 U2 U2: "differential line drivers and receivers"

## Free pads (board coordinates)
  round 60 hole 36: 0(1970,1365) 0(1970,1945) 0(1970,2525) 0(1970,3105) 0(1970,3685) 0(1970,4265) 0(3155,1365) 0(3155,1945) 0(3155,2525) 0(3155,3105) 0(3155,3685) 0(3155,4265) 1(1970,1160) 1(1970,1740) 1(1970,2320) 1(1970,2900) 1(1970,3480) 1(1970,4060) 1(3155,1160) 1(3155,1740) 1(3155,2320) 1(3155,2900) 1(3155,3480) 1(3155,4060) 2(955,1060) 2(955,1640) 2(955,2220) 2(955,2800) 2(955,3380) 2(955,3960) 2(2140,1060) 2(2140,1640) 2(2140,2220) 2(2140,2800) 2(2140,3380) 2(2140,3960) 3(955,1460) 3(955,2040) 3(955,2620) 3(955,3200) 3(955,3780) 3(955,4360) 3(2140,1460) 3(2140,2040) 3(2140,2620) 3(2140,3200) 3(2140,3780) 3(2140,4360)
  round 36 hole 36: 3(2055,1550) 4(2055,2130) 5(2055,2710) 6(2055,3290) 8(2055,3870)

## Via types
v1: diameter 32, hole 16, Top Layer to Bottom Layer, 156 vias

## Nets (pads, with @x,y where several pads share a name; then routed paths per layer and width w, separated by ;. In a path a pad name is that pad's centre, name@x,y a point inside that pad or via, vN(x,y) a via of type N, cw(c..) or ccw(c..) an arc to the next point about the centre after c; other vN are vias at no path point)
GND: C1.1 C2.1 C3.1 C4.1 J1.1 J1.3 J1.5 J1.7 J1.9 pad.0 pad.1 pad.2 pad.3@955,1460 pad.3@955,2040 pad.3@955,2620 pad.3@955,3200 pad.3@955,3780 pad.3@955,4360 pad.3@2140,1460 pad.3@2140,2040 pad.3@2140,2620 pad.3@2140,3200 pad.3@2140,3780 pad.3@2140,4360 R9.2 U1.4 U1.8 U1.12 U2.4 U2.8 | length 7654.1
  Top Layer w20: v1(1250,1385) C2.1@1250,1480 ; v1(1250,1965) C2.1@1250,2060 ; v1(1250,2545) C2.1@1250,2640 ; v1(1250,3125) C2.1@1250,3220 ; v1(1250,3705) C2.1@1250,3800 ; v1(1250,4285) C2.1@1250,4380 ; U1.4@1465,1125 1465,1070 v1(1490,1045) ; U1.4@1465,1705 1465,1650 v1(1490,1625) ; U1.4@1465,2285 1465,2230 v1(1490,2205) ; U1.4@1465,2865 1465,2810 v1(1490,2785) ; U1.4@1465,3445 1465,3390 v1(1490,3365) ; U1.4@1465,4025 1465,3970 v1(1490,3945) ; v1(1515,1275) 1515,1295 1515,1340 U1.12@1515,1345 ; v1(1515,1855) 1515,1875 1515,1920 U1.12@1515,1925 ; v1(1515,2435) 1515,2455 1515,2500 U1.12@1515,2505 ; v1(1515,3015) 1515,3035 1515,3080 U1.12@1515,3085 ; v1(1515,3595) 1515,3615 1515,3660 U1.12@1515,3665 ; v1(1515,4175) 1515,4195 1515,4240 U1.12@1515,4245 ; U1.8@1665,1125 v1(1665,1195) ; U1.8@1665,1705 v1(1665,1775) ; U1.8@1665,2285 v1(1665,2355) ; U1.8@1665,2865 v1(1665,2935) ; U1.8@1665,3445 v1(1665,3515) ; U1.8@1665,4025 v1(1665,4095) ; v1(2435,1385) C2.1@2435,1480 ; v1(2435,1965) C2.1@2435,2060 ; v1(2435,2545) C2.1@2435,2640 ; v1(2435,3125) C2.1@2435,3220 ; v1(2435,3705) C2.1@2435,3800 ; v1(2435,4285) C2.1@2435,4380 ; U1.4@2650,1125 2650,1070 v1(2675,1045) ; U1.4@2650,1705 2650,1650 v1(2675,1625) ; U1.4@2650,2285 2650,2230 v1(2675,2205) ; U1.4@2650,2865 2650,2810 v1(2675,2785) ; U1.4@2650,3445 2650,3390 v1(2675,3365) ; U1.4@2650,4025 2650,3970 v1(2675,3945) ; v1(2700,1275) 2700,1295 2700,1340 U1.12@2700,1345 ; v1(2700,1855) 2700,1875 2700,1920 U1.12@2700,1925 ; v1(2700,2435) 2700,2455 2700,2500 U1.12@2700,2505 ; v1(2700,3015) 2700,3035 2700,3080 U1.12@2700,3085 ; v1(2700,3595) 2700,3615 2700,3660 U1.12@2700,3665 ; v1(2700,4175) 2700,4195 2700,4240 U1.12@2700,4245 ; U1.8@2850,1125 v1(2850,1195) ; U1.8@2850,1705 v1(2850,1775) ; U1.8@2850,2285 v1(2850,2355) ; U1.8@2850,2865 v1(2850,2935) ; U1.8@2850,3445 v1(2850,3515) ; U1.8@2850,4025 v1(2850,4095)
  Bottom Layer w20: R9.2@1250,1340 v1(1250,1385) ; R9.2@1250,1920 v1(1250,1965) ; R9.2@1250,2500 v1(1250,2545) ; R9.2@1250,3080 v1(1250,3125) ; R9.2@1250,3660 v1(1250,3705) ; R9.2@1250,4240 v1(1250,4285) ; v1@1314.94,1194.94 v1@1315,1195 ; v1@1314.94,1774.94 v1@1315,1775 ; v1@1314.94,2354.94 v1@1315,2355 ; v1@1314.94,2934.94 v1@1315,2935 ; v1@1314.94,3514.94 v1@1315,3515 ; v1@1314.94,4094.94 v1@1315,4095 ; U2.8@1315,1120 1315,1190 v1(1320,1195) ; U2.8@1315,1700 1315,1770 v1(1320,1775) ; U2.8@1315,2280 1315,2350 v1(1320,2355) ; U2.8@1315,2860 1315,2930 v1(1320,2935) ; U2.8@1315,3440 1315,3510 v1(1320,3515) ; U2.8@1315,4020 1315,4090 v1(1320,4095) ; v1(1490,1045) 1514.94,1069.94 U2.4@1514.94,1125 ; v1(1490,1625) 1514.94,1649.94 U2.4@1514.94,1705 ; v1(1490,2205) 1514.94,2229.94 U2.4@1514.94,2285 ; v1(1490,2785) 1514.94,2809.94 U2.4@1514.94,2865 ; v1(1490,3365) 1514.94,3389.94 U2.4@1514.94,3445 ; v1(1490,3945) 1514.94,3969.94 U2.4@1514.94,4025 ; v1(1555,1480) C4.1@1600,1480 C3.1@1600,1425 ; v1(1555,2060) C4.1@1600,2060 C3.1@1600,2005 ; v1(1555,2640) C4.1@1600,2640 C3.1@1600,2585 ; v1(1555,3220) C4.1@1600,3220 C3.1@1600,3165 ; v1(1555,3800) C4.1@1600,3800 C3.1@1600,3745 ; v1(1555,4380) C4.1@1600,4380 C3.1@1600,4325 ; R9.2@2435,1340 v1(2435,1385) ; R9.2@2435,1920 v1(2435,1965) ; R9.2@2435,2500 v1(2435,2545) ; R9.2@2435,3080 v1(2435,3125) ; R9.2@2435,3660 v1(2435,3705) ; R9.2@2435,4240 v1(2435,4285) ; v1@2499.94,1194.94 v1@2500,1195 ; v1@2499.94,1774.94 v1@2500,1775 ; v1@2499.94,2354.94 v1@2500,2355 ; v1@2499.94,2934.94 v1@2500,2935 ; v1@2499.94,3514.94 v1@2500,3515 ; v1@2499.94,4094.94 v1@2500,4095 ; U2.8@2500,1120 2500,1190 v1(2505,1195) ; U2.8@2500,1700 2500,1770 v1(2505,1775) ; U2.8@2500,2280 2500,2350 v1(2505,2355) ; U2.8@2500,2860 2500,2930 v1(2505,2935) ; U2.8@2500,3440 2500,3510 v1(2505,3515) ; U2.8@2500,4020 2500,4090 v1(2505,4095) ; v1(2675,1045) 2699.94,1069.94 U2.4@2699.94,1125 ; v1(2675,1625) 2699.94,1649.94 U2.4@2699.94,1705 ; v1(2675,2205) 2699.94,2229.94 U2.4@2699.94,2285 ; v1(2675,2785) 2699.94,2809.94 U2.4@2699.94,2865 ; v1(2675,3365) 2699.94,3389.94 U2.4@2699.94,3445 ; v1(2675,3945) 2699.94,3969.94 U2.4@2699.94,4025 ; v1(2740,1480) C4.1@2785,1480 C3.1@2785,1425 ; v1(2740,2060) C4.1@2785,2060 C3.1@2785,2005 ; v1(2740,2640) C4.1@2785,2640 C3.1@2785,2585 ; v1(2740,3220) C4.1@2785,3220 C3.1@2785,3165 ; v1(2740,3800) C4.1@2785,3800 C3.1@2785,3745 ; v1(2740,4380) C4.1@2785,4380 C3.1@2785,4325
NetJ2_7: J2.7 R8.2 | length 5137.6
  Top Layer w10: v1(1510,1480) 1510,1470 1515,1465 1535,1445 1725,1445 1735,1455 1790,1455 1835,1410 J2.7@1860,1410 ; v1(1510,2060) 1510,2050 1515,2045 1535,2025 1725,2025 1735,2035 1790,2035 1835,1990 J2.7@1860,1990 ; v1(1510,2640) 1510,2630 1515,2625 1535,2605 1725,2605 1735,2615 1790,2615 1835,2570 J2.7@1860,2570 ; v1(1510,3220) 1510,3210 1515,3205 1535,3185 1725,3185 1735,3195 1790,3195 1835,3150 J2.7@1860,3150 ; v1(1510,3800) 1510,3790 1515,3785 1535,3765 1725,3765 1735,3775 1790,3775 1835,3730 J2.7@1860,3730 ; v1(1510,4380) 1510,4370 1515,4365 1535,4345 1725,4345 1735,4355 1790,4355 1835,4310 J2.7@1860,4310 ; v1(2695,1480) 2695,1470 2700,1465 2720,1445 2910,1445 2920,1455 2975,1455 3020,1410 J2.7@3045,1410 ; v1(2695,2060) 2695,2050 2700,2045 2720,2025 2910,2025 2920,2035 2975,2035 3020,1990 J2.7@3045,1990 ; v1(2695,2640) 2695,2630 2700,2625 2720,2605 2910,2605 2920,2615 2975,2615 3020,2570 J2.7@3045,2570 ; v1(2695,3220) 2695,3210 2700,3205 2720,3185 2910,3185 2920,3195 2975,3195 3020,3150 J2.7@3045,3150 ; v1(2695,3800) 2695,3790 2700,3785 2720,3765 2910,3765 2920,3775 2975,3775 3020,3730 J2.7@3045,3730 ; v1(2695,4380) 2695,4370 2700,4365 2720,4345 2910,4345 2920,4355 2975,4355 3020,4310 J2.7@3045,4310
  Bottom Layer w10: R8.2@1475,1480 v1(1510,1480) ; R8.2@1475,2060 v1(1510,2060) ; R8.2@1475,2640 v1(1510,2640) ; R8.2@1475,3220 v1(1510,3220) ; R8.2@1475,3800 v1(1510,3800) ; R8.2@1475,4380 v1(1510,4380) ; R8.2@2660,1480 v1(2695,1480) ; R8.2@2660,2060 v1(2695,2060) ; R8.2@2660,2640 v1(2695,2640) ; R8.2@2660,3220 v1(2695,3220) ; R8.2@2660,3800 v1(2695,3800) ; R8.2@2660,4380 v1(2695,4380)
NetJ2_8: J2.8 R7.2 | length 3554.6
  Top Layer w10: v1(1510,1425) 1745,1425 J2.8@1760,1410 ; v1(1510,2005) 1745,2005 J2.8@1760,1990 ; v1(1510,2585) 1745,2585 J2.8@1760,2570 ; v1(1510,3165) 1745,3165 J2.8@1760,3150 ; v1(1510,3745) 1745,3745 J2.8@1760,3730 ; v1(1510,4325) 1745,4325 J2.8@1760,4310 ; v1(2695,1425) 2930,1425 J2.8@2945,1410 ; v1(2695,2005) 2930,2005 J2.8@2945,1990 ; v1(2695,2585) 2930,2585 J2.8@2945,2570 ; v1(2695,3165) 2930,3165 J2.8@2945,3150 ; v1(2695,3745) 2930,3745 J2.8@2945,3730 ; v1(2695,4325) 2930,4325 J2.8@2945,4310
  Bottom Layer w10: R7.2@1470,1425 v1(1510,1425) ; R7.2@1470,2005 v1(1510,2005) ; R7.2@1470,2585 v1(1510,2585) ; R7.2@1470,3165 v1(1510,3165) ; R7.2@1470,3745 v1(1510,3745) ; R7.2@1470,4325 v1(1510,4325) ; R7.2@2655,1425 v1(2695,1425) ; R7.2@2655,2005 v1(2695,2005) ; R7.2@2655,2585 v1(2695,2585) ; R7.2@2655,3165 v1(2695,3165) ; R7.2@2655,3745 v1(2695,3745) ; R7.2@2655,4325 v1(2695,4325)
NetR1_1: R1.1 U1.3 | length 3296.5
  Top Layer w10: 1270,1185 1285,1200 1285,1210 1290,1215 1295,1220 1295,1225 ; 1270,1765 1285,1780 1285,1790 1290,1795 1295,1800 1295,1805 ; 1270,2345 1285,2360 1285,2370 1290,2375 1295,2380 1295,2385 ; 1270,2925 1285,2940 1285,2950 1290,2955 1295,2960 1295,2965 ; 1270,3505 1285,3520 1285,3530 1290,3535 1295,3540 1295,3545 ; 1270,4085 1285,4100 1285,4110 1290,4115 1295,4120 1295,4125 ; 2455,1185 2470,1200 2470,1210 2475,1215 2480,1220 2480,1225 ; 2455,1765 2470,1780 2470,1790 2475,1795 2480,1800 2480,1805 ; 2455,2345 2470,2360 2470,2370 2475,2375 2480,2380 2480,2385 ; 2455,2925 2470,2940 2470,2950 2475,2955 2480,2960 2480,2965 ; 2455,3505 2470,3520 2470,3530 2475,3535 2480,3540 2480,3545 ; 2455,4085 2470,4100 2470,4110 2475,4115 2480,4120 2480,4125
  Top Layer w20: R1.1@1250,1165 1270,1185 ; R1.1@1250,1745 1270,1765 ; R1.1@1250,2325 1270,2345 ; R1.1@1250,2905 1270,2925 ; R1.1@1250,3485 1270,3505 ; R1.1@1250,4065 1270,4085 ; 1295,1225 1305,1235 1350,1235 1415,1170 U1.3@1415,1125 ; 1295,1805 1305,1815 1350,1815 1415,1750 U1.3@1415,1705 ; 1295,2385 1305,2395 1350,2395 1415,2330 U1.3@1415,2285 ; 1295,2965 1305,2975 1350,2975 1415,2910 U1.3@1415,2865 ; 1295,3545 1305,3555 1350,3555 1415,3490 U1.3@1415,3445 ; 1295,4125 1305,4135 1350,4135 1415,4070 U1.3@1415,4025 ; R1.1@2435,1165 2455,1185 ; R1.1@2435,1745 2455,1765 ; R1.1@2435,2325 2455,2345 ; R1.1@2435,2905 2455,2925 ; R1.1@2435,3485 2455,3505 ; R1.1@2435,4065 2455,4085 ; 2480,1225 2490,1235 2535,1235 2600,1170 U1.3@2600,1125 ; 2480,1805 2490,1815 2535,1815 2600,1750 U1.3@2600,1705 ; 2480,2385 2490,2395 2535,2395 2600,2330 U1.3@2600,2285 ; 2480,2965 2490,2975 2535,2975 2600,2910 U1.3@2600,2865 ; 2480,3545 2490,3555 2535,3555 2600,3490 U1.3@2600,3445 ; 2480,4125 2490,4135 2535,4135 2600,4070 U1.3@2600,4025
NetR2_1: R2.1 U1.5 | length 4231.6
  Top Layer w20: R2.1@1250,1280 1255,1275 1385,1275 1460,1200 1480,1200 1515,1165 U1.5@1515,1125 ; R2.1@1250,1860 1255,1855 1385,1855 1460,1780 1480,1780 1515,1745 U1.5@1515,1705 ; R2.1@1250,2440 1255,2435 1385,2435 1460,2360 1480,2360 1515,2325 U1.5@1515,2285 ; R2.1@1250,3020 1255,3015 1385,3015 1460,2940 1480,2940 1515,2905 U1.5@1515,2865 ; R2.1@1250,3600 1255,3595 1385,3595 1460,3520 1480,3520 1515,3485 U1.5@1515,3445 ; R2.1@1250,4180 1255,4175 1385,4175 1460,4100 1480,4100 1515,4065 U1.5@1515,4025 ; R2.1@2435,1280 2440,1275 2570,1275 2645,1200 2665,1200 2700,1165 U1.5@2700,1125 ; R2.1@2435,1860 2440,1855 2570,1855 2645,1780 2665,1780 2700,1745 U1.5@2700,1705 ; R2.1@2435,2440 2440,2435 2570,2435 2645,2360 2665,2360 2700,2325 U1.5@2700,2285 ; R2.1@2435,3020 2440,3015 2570,3015 2645,2940 2665,2940 2700,2905 U1.5@2700,2865 ; R2.1@2435,3600 2440,3595 2570,3595 2645,3520 2665,3520 2700,3485 U1.5@2700,3445 ; R2.1@2435,4180 2440,4175 2570,4175 2645,4100 2665,4100 2700,4065 U1.5@2700,4025
NetR6_1: R6.1 U2.3 | length 5261.6
  Bottom Layer w20: R6.1@1250,1160 1250,1190 1295,1235 1350,1235 1385,1200 1540,1200 1564.94,1175.06 U2.3@1564.94,1125 ; R6.1@1250,1740 1250,1770 1295,1815 1350,1815 1385,1780 1540,1780 1564.94,1755.06 U2.3@1564.94,1705 ; R6.1@1250,2320 1250,2350 1295,2395 1350,2395 1385,2360 1540,2360 1564.94,2335.06 U2.3@1564.94,2285 ; R6.1@1250,2900 1250,2930 1295,2975 1350,2975 1385,2940 1540,2940 1564.94,2915.06 U2.3@1564.94,2865 ; R6.1@1250,3480 1250,3510 1295,3555 1350,3555 1385,3520 1540,3520 1564.94,3495.06 U2.3@1564.94,3445 ; R6.1@1250,4060 1250,4090 1295,4135 1350,4135 1385,4100 1540,4100 1564.94,4075.06 U2.3@1564.94,4025 ; R6.1@2435,1160 2435,1190 2480,1235 2535,1235 2570,1200 2725,1200 2749.94,1175.06 U2.3@2749.94,1125 ; R6.1@2435,1740 2435,1770 2480,1815 2535,1815 2570,1780 2725,1780 2749.94,1755.06 U2.3@2749.94,1705 ; R6.1@2435,2320 2435,2350 2480,2395 2535,2395 2570,2360 2725,2360 2749.94,2335.06 U2.3@2749.94,2285 ; R6.1@2435,2900 2435,2930 2480,2975 2535,2975 2570,2940 2725,2940 2749.94,2915.06 U2.3@2749.94,2865 ; R6.1@2435,3480 2435,3510 2480,3555 2535,3555 2570,3520 2725,3520 2749.94,3495.06 U2.3@2749.94,3445 ; R6.1@2435,4060 2435,4090 2480,4135 2535,4135 2570,4100 2725,4100 2749.94,4075.06 U2.3@2749.94,4025
TDI+: J2.5 R5.1 U2.2 | length 6255.3
  Bottom Layer w10: R5.1@1610,1045 1610,1050 1615,1055 1615,1124.94 U2.2@1614.94,1125 1610,1129.94 1610,1215 1645,1250 1670,1250 1715,1295 1715,1330 1740,1355 1780,1355 1825,1310 J2.5@1860,1310 ; R5.1@1610,1625 1610,1630 1615,1635 1615,1704.94 U2.2@1614.94,1705 1610,1709.94 1610,1795 1645,1830 1670,1830 1715,1875 1715,1910 1740,1935 1780,1935 1825,1890 J2.5@1860,1890 ; R5.1@1610,2205 1610,2210 1615,2215 1615,2284.94 U2.2@1614.94,2285 1610,2289.94 1610,2375 1645,2410 1670,2410 1715,2455 1715,2490 1740,2515 1780,2515 1825,2470 J2.5@1860,2470 ; R5.1@1610,2785 1610,2790 1615,2795 1615,2864.94 U2.2@1614.94,2865 1610,2869.94 1610,2955 1645,2990 1670,2990 1715,3035 1715,3070 1740,3095 1780,3095 1825,3050 J2.5@1860,3050 ; R5.1@1610,3365 1610,3370 1615,3375 1615,3444.94 U2.2@1614.94,3445 1610,3449.94 1610,3535 1645,3570 1670,3570 1715,3615 1715,3650 1740,3675 1780,3675 1825,3630 J2.5@1860,3630 ; R5.1@1610,3945 1610,3950 1615,3955 1615,4024.94 U2.2@1614.94,4025 1610,4029.94 1610,4115 1645,4150 1670,4150 1715,4195 1715,4230 1740,4255 1780,4255 1825,4210 J2.5@1860,4210 ; R5.1@2795,1045 2795,1050 2800,1055 2800,1124.94 U2.2@2799.94,1125 2795,1129.94 2795,1215 2830,1250 2855,1250 2900,1295 2900,1330 2925,1355 2965,1355 3010,1310 J2.5@3045,1310 ; R5.1@2795,1625 2795,1630 2800,1635 2800,1704.94 U2.2@2799.94,1705 2795,1709.94 2795,1795 2830,1830 2855,1830 2900,1875 2900,1910 2925,1935 2965,1935 3010,1890 J2.5@3045,1890 ; R5.1@2795,2205 2795,2210 2800,2215 2800,2284.94 U2.2@2799.94,2285 2795,2289.94 2795,2375 2830,2410 2855,2410 2900,2455 2900,2490 2925,2515 2965,2515 3010,2470 J2.5@3045,2470 ; R5.1@2795,2785 2795,2790 2800,2795 2800,2864.94 U2.2@2799.94,2865 2795,2869.94 2795,2955 2830,2990 2855,2990 2900,3035 2900,3070 2925,3095 2965,3095 3010,3050 J2.5@3045,3050 ; R5.1@2795,3365 2795,3370 2800,3375 2800,3444.94 U2.2@2799.94,3445 2795,3449.94 2795,3535 2830,3570 2855,3570 2900,3615 2900,3650 2925,3675 2965,3675 3010,3630 J2.5@3045,3630 ; R5.1@2795,3945 2795,3950 2800,3955 2800,4024.94 U2.2@2799.94,4025 2795,4029.94 2795,4115 2830,4150 2855,4150 2900,4195 2900,4230 2925,4255 2965,4255 3010,4210 J2.5@3045,4210
TDI-: J2.6 R5.2 U2.1 | length 4200.7
  Bottom Layer w10: R5.2@1670,1045 1664.94,1050.06 U2.1@1664.94,1125 1664.94,1150.06 1630,1185 1630,1205 1655,1230 1680,1230 J2.6@1760,1310 ; R5.2@1670,1625 1664.94,1630.06 U2.1@1664.94,1705 1664.94,1730.06 1630,1765 1630,1785 1655,1810 1680,1810 J2.6@1760,1890 ; R5.2@1670,2205 1664.94,2210.06 U2.1@1664.94,2285 1664.94,2310.06 1630,2345 1630,2365 1655,2390 1680,2390 J2.6@1760,2470 ; R5.2@1670,2785 1664.94,2790.06 U2.1@1664.94,2865 1664.94,2890.06 1630,2925 1630,2945 1655,2970 1680,2970 J2.6@1760,3050 ; R5.2@1670,3365 1664.94,3370.06 U2.1@1664.94,3445 1664.94,3470.06 1630,3505 1630,3525 1655,3550 1680,3550 J2.6@1760,3630 ; R5.2@1670,3945 1664.94,3950.06 U2.1@1664.94,4025 1664.94,4050.06 1630,4085 1630,4105 1655,4130 1680,4130 J2.6@1760,4210 ; R5.2@2855,1045 2849.94,1050.06 U2.1@2849.94,1125 2849.94,1150.06 2815,1185 2815,1205 2840,1230 2865,1230 J2.6@2945,1310 ; R5.2@2855,1625 2849.94,1630.06 U2.1@2849.94,1705 2849.94,1730.06 2815,1765 2815,1785 2840,1810 2865,1810 J2.6@2945,1890 ; R5.2@2855,2205 2849.94,2210.06 U2.1@2849.94,2285 2849.94,2310.06 2815,2345 2815,2365 2840,2390 2865,2390 J2.6@2945,2470 ; R5.2@2855,2785 2849.94,2790.06 U2.1@2849.94,2865 2849.94,2890.06 2815,2925 2815,2945 2840,2970 2865,2970 J2.6@2945,3050 ; R5.2@2855,3365 2849.94,3370.06 U2.1@2849.94,3445 2849.94,3470.06 2815,3505 2815,3525 2840,3550 2865,3550 J2.6@2945,3630 ; R5.2@2855,3945 2849.94,3950.06 U2.1@2849.94,4025 2849.94,4050.06 2815,4085 2815,4105 2840,4130 2865,4130 J2.6@2945,4210